# Altium PCB PCB1.PcbDoc (part 8 of 8)
Units mil, origin at the board's own origin, x right, y up, seen from the top; angles counter-clockwise.
Board outline 6000 x 4000 mil, 2 copper layers (Top Layer, Bottom Layer); 1253 components, 565 nets, 6549 pads, 0 vias.
Unrouted connection lines stored in the file: 1925.
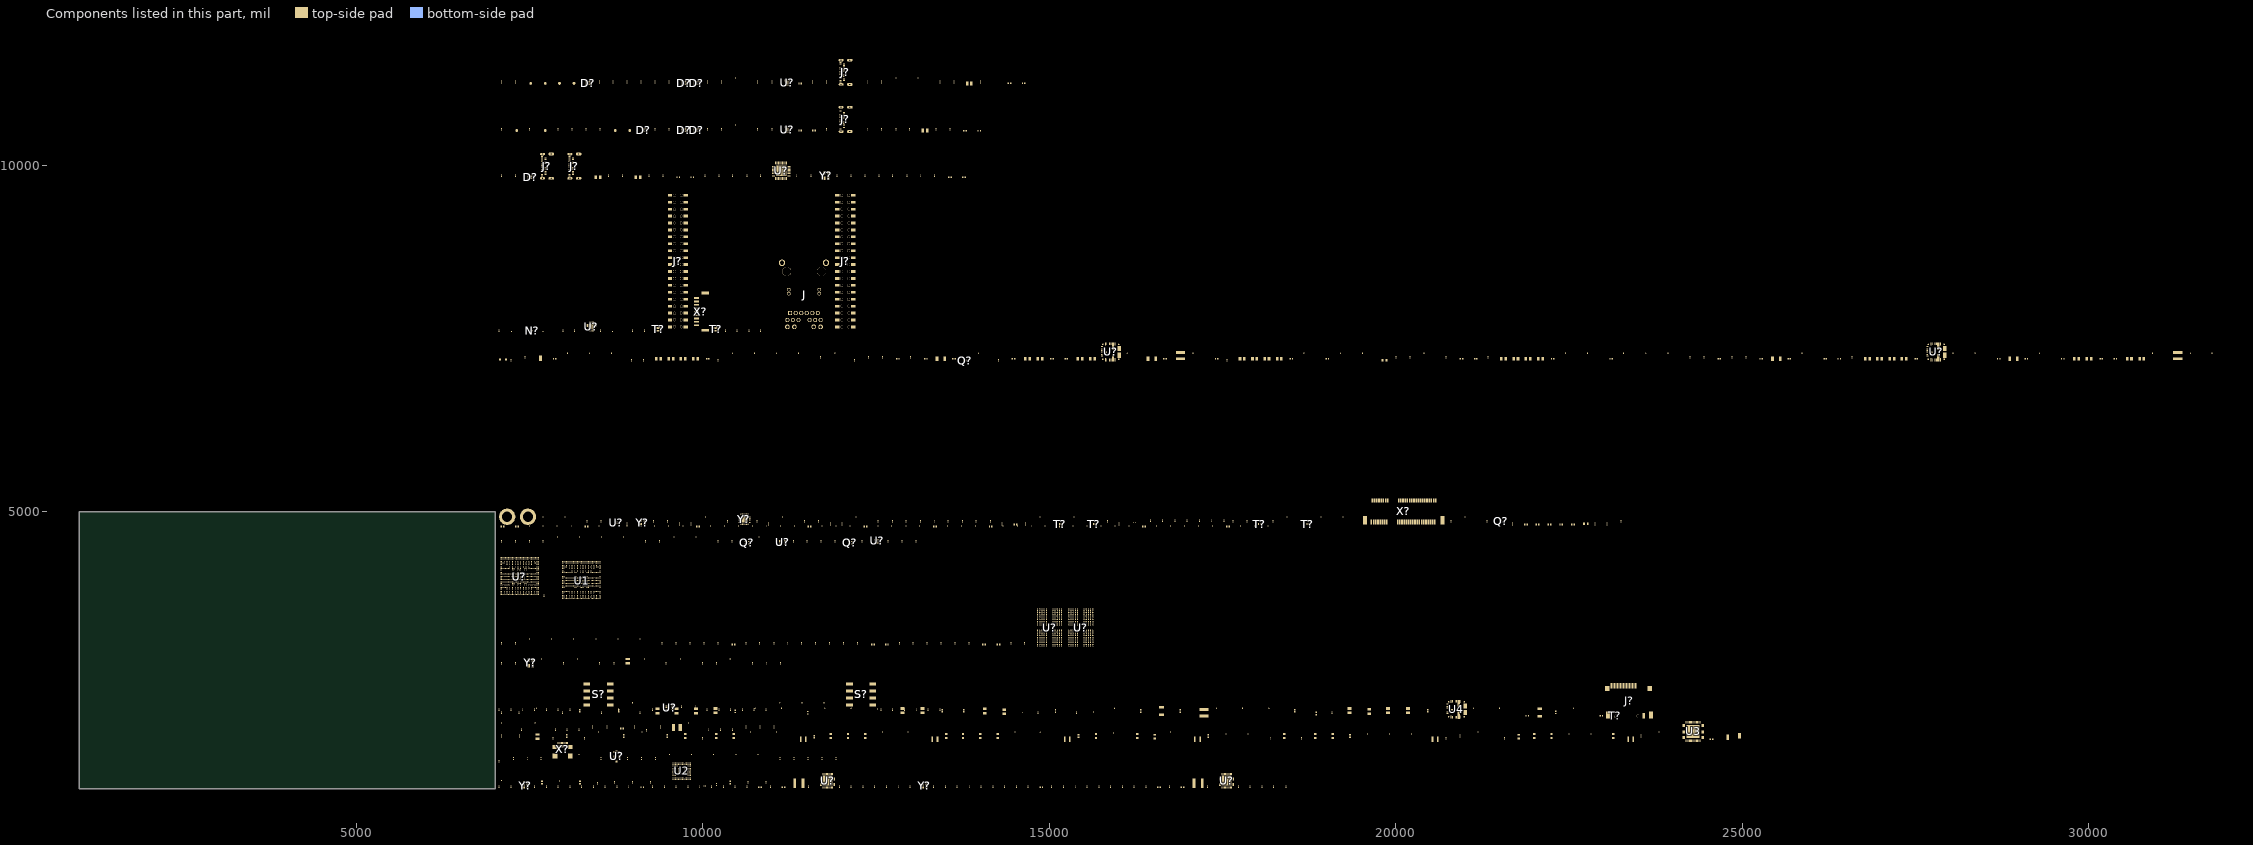
[diagram p6: the components of this part, seen from the top]

## Nets (pads, with @x,y where several pads share a name; then routed paths per layer and width w, separated by ;. In a path a pad name is that pad's centre, name@x,y a point inside that pad or via, vN(x,y) a via of type N, cw(c..) or ccw(c..) an arc to the next point about the centre after c; other vN are vias at no path point) (continued)
pads on no net: 1?.1@16219.17,4840 1?.2@16240.83,4840 ?.1@16460,4854.17 ?.1@16635,4854.17 ?.1@16815,4854.17 ?.1@16990,4854.17 ?.1@17170,4854.17 ?.1@17345,4854.17 ?.1@17525,4854.17 ?.2@16460,4875.83 ?.2@16635,4875.83 ?.2@16815,4875.83 ?.2@16990,4875.83 ?.2@17170,4875.83 ?.2@17345,4875.83 ?.2@17525,4875.83 C?.1@7060,1383.58 C?.1@7060,7598.58 C?.1@7090,2798.58 C?.1@7090,10508.58 C?.1@7230,1013.58 C?.1@7265,1423.58 C?.1@7295,2798.58 C?.1@7295,11188.58 C?.1@7465,1423.58 C?.1@7500,10508.58 C?.1@7570,1013.58 C?.1@7740,1013.58 C?.1@7844.25,7205 C?.1@7910,1013.58 C?.1@7980,7598.58 C?.1@8080,1013.58 C?.1@8250,1013.58 C?.1@8420,1013.58 C?.1@8453.5,9825 C?.1@8505,11188.58 C?.1@8510,2798.58 C?.1@8525,7598.58 C?.1@8530,1423.58 C?.1@8530,4848.58 C?.1@8590,1013.58 C?.1@8640,9833.58 C?.1@8715,2798.58 C?.1@8760,1013.58 C?.1@8817.28,1870 C?.1@8905,4808.58 C?.1@8915,1423.58 C?.1@8930,1013.58 C?.1@8970,7173.58 C?.1@9015,1878.58 C?.1@9033.5,9825 C?.1@9107.28,1020 C?.1@9115,1423.58 C?.1@9140,7173.58 C?.1@9175,4558.58 C?.1@9220,9833.58 C?.1@9275,1013.58 C?.1@9290,4848.58 C?.1@9328.5,7205 C?.1@9385,1878.58 C?.1@9445,1013.58 C?.1@9490,4848.58 C?.1@9508.5,7205 C?.1@9574.8,1885 C?.1@9615,1013.58 C?.1@9615,3088.58 C?.1@9660,4808.58 C?.1@9683.5,7205 C?.1@9690,2168.58 C?.1@9785,1013.58 C?.1@9815,3088.58 C?.1@9830,4808.58 C?.1@9863.5,7205 C?.1@9890,2168.58 C?.1@9955,1013.58 C?.1@10015,3088.58 C?.1@10054.25,7205 C?.1@10070,10508.58 C?.1@10070,11188.58 C?.1@10220,3088.58 C?.1@10270,10508.58 C?.1@10270,11188.58 C?.1@10295,1013.58 C?.1@10325,7598.58 C?.1@10422.28,3080 C?.1@10465,1013.58 C?.1@10495,7598.58 C?.1@10620,3088.58 C?.1@10625,1878.58 C?.1@10665,7598.58 C?.1@10780,4848.58 C?.1@10790,10508.58 C?.1@10790,11188.58 C?.1@10807.28,1020 C?.1@10820,3088.58 C?.1@10835,7598.58 C?.1@10950,4808.58 C?.1@10975,1013.58 C?.1@10995,10508.58 C?.1@10995,11188.58 C?.1@11025,3088.58 C?.1@11147.28,1020 C?.1@11305,4558.58 C?.1@11355,9833.58 C?.1@11387.28,10500 C?.1@11387.28,11180 C?.1@11560,9833.58 C?.1@11585,11188.58 C?.1@11587.28,10500 C?.1@11625,3088.58 C?.1@11670,4848.58 C?.1@11840,4808.58 C?.1@11905,4558.58 C?.1@11970,1013.58 C?.1@12010,4808.58 C?.1@12030,3088.58 C?.1@12135,9833.58 C?.1@12140,1013.58 C?.1@12230,3088.58 C?.1@12340,9833.58 C?.1@12437.28,3080 C?.1@12540,9833.58 C?.1@12637.28,3080 C?.1@12670,4558.58 C?.1@12740,9833.58 C?.1@12785,10508.58 C?.1@12799.25,7205 C?.1@12835,3088.58 C?.1@12875,4558.58 C?.1@12945,9833.58 C?.1@12985,10508.58 C?.1@12990,1013.58 C?.1@12995,7213.58 C?.1@13035,3088.58 C?.1@13145,9833.58 C?.1@13173.5,10500 C?.1@13204.25,7205 C?.1@13235,3088.58 C?.1@13330,1013.58 C?.1@13345,9833.58 C?.1@13365,10508.58 C?.1@13379.88,7205 C?.1@13425,11188.58 C?.1@13440,3088.58 C?.1@13500,1013.58 C?.1@13547.28,9825 C?.1@13609.25,7205 C?.1@13625,11188.58 C?.1@13670,1013.58 C?.1@13752.28,9825 C?.1@13813.5,11180 C?.1@13845,1013.58 C?.1@14005,11188.58 C?.1@14015,1013.58 C?.1@14042.28,3080 C?.1@14185,1013.58 C?.1@14247.28,3080 C?.1@14320,4808.58 C?.1@14355,1013.58 C?.1@14445,3088.58 C?.1@14492.28,4815 C?.1@14525,1013.58 C?.1@14645,3088.58 C?.1@14653.5,7205 C?.1@14660,4808.58 C?.1@14695,1013.58 C?.1@14833.5,7205 C?.1@14867.28,1020 C?.1@15024.25,7205 C?.1@15035,1013.58 C?.1@15205,1013.58 C?.1@15229.25,7205 C?.1@15375,1013.58 C?.1@15413.5,7205 C?.1@15545,1013.58 C?.1@15593.5,7205 C?.1@15715,1013.58 C?.1@16010,4808.58 C?.1@16055,1013.58 C?.1@16225,1013.58 C?.1@16424.88,7205 C?.1@16567.28,1020 C?.1@16654.25,7205 C?.1@16735,1013.58 C?.1@16907.28,1020 C?.1@17399.25,7205 C?.1@17730,1013.58 C?.1@17753.5,7205 C?.1@17900,1013.58 C?.1@17933.5,7205 C?.1@18108.5,7205 C?.1@18230,4848.58 C?.1@18288.5,7205 C?.1@18479.25,7205 C?.1@20934.25,7205 C?.1@21139.25,7205 C?.1@21523.5,7205 C?.1@21685,4808.58 C?.1@21703.5,7205 C?.1@21862.28,4815 C?.1@21878.5,7205 C?.1@22032.28,4815 C?.1@22058.5,7205 C?.1@22202.28,4815 C?.1@22249.25,7205 C?.1@22372.28,4815 C?.1@22542.28,4815 C?.1@22717.44,4825 C?.1@22880,4808.58 C?.1@23050,4808.58 C?.1@24654.25,7205 C?.1@25055,7213.58 C?.1@25259.25,7205 C?.1@25439.88,7205 C?.1@25664.25,7205 C?.1@26184.25,7205 C?.1@26778.5,7205 C?.1@26953.5,7205 C?.1@27133.5,7205 C?.1@27308.5,7205 C?.1@27499.25,7205 C?.1@28864.88,7205 C?.1@29089.25,7205 C?.1@29798.5,7205 C?.1@29978.5,7205 C?.1@30169.25,7205 C?.1@30374.25,7205 C?.1@30558.5,7205 C?.1@30738.5,7205 C?.2@7060,1406.42 C?.2@7060,7621.42 C?.2@7090,2821.42 C?.2@7090,10531.42 C?.2@7230,1036.42 C?.2@7265,1446.42 C?.2@7295,2821.42 C?.2@7295,11211.42 C?.2@7465,1446.42 C?.2@7500,10531.42 C?.2@7570,1036.42 C?.2@7740,1036.42 C?.2@7875.75,7205 C?.2@7910,1036.42 C?.2@7980,7621.42 C?.2@8080,1036.42 C?.2@8250,1036.42 C?.2@8420,1036.42 C?.2@8505,11211.42 C?.2@8510,2821.42 C?.2@8516.5,9825 C?.2@8525,7621.42 C?.2@8530,1446.42 C?.2@8530,4871.42 C?.2@8590,1036.42 C?.2@8640,9856.42 C?.2@8715,2821.42 C?.2@8760,1036.42 C?.2@8852.72,1870 C?.2@8905,4831.42 C?.2@8915,1446.42 C?.2@8930,1036.42 C?.2@8970,7196.42 C?.2@9015,1901.42 C?.2@9096.5,9825 C?.2@9115,1446.42 C?.2@9140,7196.42 C?.2@9142.72,1020 C?.2@9175,4581.42 C?.2@9220,9856.42 C?.2@9275,1036.42 C?.2@9290,4871.42 C?.2@9385,1901.42 C?.2@9391.5,7205 C?.2@9445,1036.42 C?.2@9490,4871.42 C?.2@9571.5,7205 C?.2@9615,1036.42 C?.2@9615,3111.42 C?.2@9660,4831.42 C?.2@9675.2,1885 C?.2@9690,2191.42 C?.2@9746.5,7205 C?.2@9785,1036.42 C?.2@9815,3111.42 C?.2@9830,4831.42 C?.2@9890,2191.42 C?.2@9926.5,7205 C?.2@9955,1036.42 C?.2@10015,3111.42 C?.2@10070,10531.42 C?.2@10070,11211.42 C?.2@10085.75,7205 C?.2@10220,3111.42 C?.2@10270,10531.42 C?.2@10270,11211.42 C?.2@10295,1036.42 C?.2@10325,7621.42 C?.2@10457.72,3080 C?.2@10465,1036.42 C?.2@10495,7621.42 C?.2@10620,3111.42 C?.2@10625,1901.42 C?.2@10665,7621.42 C?.2@10780,4871.42 C?.2@10790,10531.42 C?.2@10790,11211.42 C?.2@10820,3111.42 C?.2@10835,7621.42 C?.2@10842.72,1020 C?.2@10950,4831.42 C?.2@10975,1036.42 C?.2@10995,10531.42 C?.2@10995,11211.42 C?.2@11025,3111.42 C?.2@11182.72,1020 C?.2@11305,4581.42 C?.2@11355,9856.42 C?.2@11422.72,10500 C?.2@11422.72,11180 C?.2@11560,9856.42 C?.2@11585,11211.42 C?.2@11622.72,10500 C?.2@11625,3111.42 C?.2@11670,4871.42 C?.2@11830,3111.42 C?.2@11840,4831.42 C?.2@11905,4581.42 C?.2@11970,1036.42 C?.2@12010,4831.42 C?.2@12030,3111.42 C?.2@12135,9856.42 C?.2@12140,1036.42 C?.2@12230,3111.42 C?.2@12340,9856.42 C?.2@12472.72,3080 C?.2@12540,9856.42 C?.2@12670,4581.42 C?.2@12672.72,3080 C?.2@12740,9856.42 C?.2@12785,10531.42 C?.2@12830.75,7205 C?.2@12835,3111.42 C?.2@12875,4581.42 C?.2@12945,9856.42 C?.2@12985,10531.42 C?.2@12990,1036.42 C?.2@12995,7236.42 C?.2@13035,3111.42 C?.2@13145,9856.42 C?.2@13235,3111.42 C?.2@13235.75,7205 C?.2@13236.5,10500 C?.2@13330,1036.42 C?.2@13345,9856.42 C?.2@13365,10531.42 C?.2@13425,11211.42 C?.2@13440,3111.42 C?.2@13490.12,7205 C?.2@13500,1036.42 C?.2@13582.72,9825 C?.2@13625,11211.42 C?.2@13640.75,7205 C?.2@13670,1036.42 C?.2@13787.72,9825 C?.2@13845,1036.42 C?.2@13876.5,11180 C?.2@14005,11211.42 C?.2@14015,1036.42 C?.2@14077.72,3080 C?.2@14185,1036.42 C?.2@14282.72,3080 C?.2@14320,4831.42 C?.2@14355,1036.42 C?.2@14445,3111.42 C?.2@14525,1036.42 C?.2@14527.72,4815 C?.2@14645,3111.42 C?.2@14660,4831.42 C?.2@14695,1036.42 C?.2@14716.5,7205 C?.2@14896.5,7205 C?.2@14902.72,1020 C?.2@15035,1036.42 C?.2@15055.75,7205 C?.2@15205,1036.42 C?.2@15260.75,7205 C?.2@15375,1036.42 C?.2@15476.5,7205 C?.2@15545,1036.42 C?.2@15656.5,7205 C?.2@15715,1036.42 C?.2@16010,4831.42 C?.2@16055,1036.42 C?.2@16225,1036.42 C?.2@16535.12,7205 C?.2@16602.72,1020 C?.2@16685.75,7205 C?.2@16735,1036.42 C?.2@16942.72,1020 C?.2@17430.75,7205 C?.2@17730,1036.42 C?.2@17816.5,7205 C?.2@17900,1036.42 C?.2@17996.5,7205 C?.2@18171.5,7205 C?.2@18230,4871.42 C?.2@18351.5,7205 C?.2@18510.75,7205 C?.2@20965.75,7205 C?.2@21170.75,7205 C?.2@21586.5,7205 C?.2@21685,4831.42 C?.2@21766.5,7205 C?.2@21897.72,4815 C?.2@21941.5,7205 C?.2@22067.72,4815 C?.2@22121.5,7205 C?.2@22237.72,4815 C?.2@22280.75,7205 C?.2@22407.72,4815 C?.2@22577.72,4815 C?.2@22772.56,4825 C?.2@22880,4831.42 C?.2@23050,4831.42 C?.2@24685.75,7205 C?.2@25055,7236.42 C?.2@25290.75,7205 C?.2@25550.12,7205 C?.2@25695.75,7205 C?.2@26215.75,7205 C?.2@26841.5,7205 C?.2@27016.5,7205 C?.2@27196.5,7205 C?.2@27371.5,7205 C?.2@27530.75,7205 C?.2@28975.12,7205 C?.2@29120.75,7205 C?.2@29861.5,7205 C?.2@30041.5,7205 C?.2@30200.75,7205 C?.2@30405.75,7205 C?.2@30621.5,7205 C?.2@30801.5,7205 D?.1@7475.63,9808.58 D?.1@8305.63,11168.58 D?.1@9110.63,10488.58 D?.1@9690.63,10488.58 D?.1@9690.63,11168.58 D?.1@9870.63,10488.58 D?.1@9870.63,11168.58 D?.2@7495.31,9808.58 D?.2@8325.32,11168.58 D?.2@9130.32,10488.58 D?.2@9710.32,10488.58 D?.2@9710.32,11168.58 D?.2@9890.32,10488.58 D?.2@9890.32,11168.58 D?.3@7515,9808.58 D?.3@8345,11168.58 D?.3@9150,10488.58 D?.3@9730,10488.58 D?.3@9730,11168.58 D?.3@9910,10488.58 D?.3@9910,11168.58 D?.4@7534.69,9808.58 D?.4@8364.68,11168.58 D?.4@9169.68,10488.58 D?.4@9749.68,10488.58 D?.4@9749.68,11168.58 D?.4@9929.68,10488.58 D?.4@9929.68,11168.58 D?.5@7554.37,9808.58 D?.5@8384.37,11168.58 D?.5@9189.37,10488.58 D?.5@9769.37,10488.58 D?.5@9769.37,11168.58 D?.5@9949.37,10488.58 D?.5@9949.37,11168.58 D?.6 D?.7 D?.8@7515,9841.44 D?.8@8345,11201.44 D?.8@9150,10521.44 D?.8@9730,10521.44 D?.8@9730,11201.44 D?.8@9910,10521.44 D?.8@9910,11201.44 D?.9 D?.10 J. J.1 J.2@11340,7865 J.3@11420,7865 J.4@11500,7865 J.5@11580,7865 J.6@11660,7865 J.7 J.8@11300,7765 J.9@11380,7765 J.10@11540,7765 J.11@11620,7765 J.12 J.13 J.14 J.15 J.16 J.17 J.18 J.19 J.20 J.S1@11142.5,8590 J.S2@11777.5,8590 J?. J?.1@7315,10500 J?.1@7515,11180 J?.1@7655,7210 J?.1@7725,10500 J?.1@7725,11180 J?.1@7930,11180 J?.1@8140,11180 J?.1@8735,10500 J?.1@8945,10500 J?.1@9754.37,7665 J?.1@12169.37,7665 J?.2@9525.63,7665 J?.2@11940.63,7665 J?.3@9754.37,7765 J?.3@12169.37,7765 J?.4@9525.63,7765 J?.4@11940.63,7765 J?.5@9754.37,7865 J?.5@12169.37,7865 J?.6@9525.63,7865 J?.6@11940.63,7865 J?.6@23247.05,2485.04 J?.7@9754.37,7965 J?.7@12169.37,7965 J?.8@9525.63,7965 J?.8@11940.63,7965 J?.9@9754.37,8065 J?.9@12169.37,8065 J?.10@9525.63,8065 J?.10@11940.63,8065 J?.11@9754.37,8165 J?.11@12169.37,8165 J?.12@9525.63,8165 J?.12@11940.63,8165 J?.13@9754.37,8265 J?.13@12169.37,8265 J?.14@9525.63,8265 J?.14@11940.63,8265 J?.15@9754.37,8365 J?.15@12169.37,8365 J?.16@9525.63,8365 J?.16@11940.63,8365 J?.17@9754.37,8465 J?.17@12169.37,8465 J?.18@9525.63,8465 J?.18@11940.63,8465 J?.19@9754.37,8565 J?.19@12169.37,8565 J?.20@9525.63,8565 J?.20@11940.63,8565 J?.21@9754.37,8665 J?.21@12169.37,8665 J?.22@9525.63,8665 J?.22@11940.63,8665 J?.23@9754.37,8765 J?.23@12169.37,8765 J?.24@9525.63,8765 J?.24@11940.63,8765 J?.25@9754.37,8865 J?.25@12169.37,8865 J?.26@9525.63,8865 J?.26@11940.63,8865 J?.27@9754.37,8965 J?.27@12169.37,8965 J?.28@9525.63,8965 J?.28@11940.63,8965 J?.29@9754.37,9065 J?.29@12169.37,9065 J?.30@9525.63,9065 J?.30@11940.63,9065 J?.31@9754.37,9165 J?.31@12169.37,9165 J?.32@9525.63,9165 J?.32@11940.63,9165 J?.33@9754.37,9265 J?.33@12169.37,9265 J?.34@9525.63,9265 J?.34@11940.63,9265 J?.35@9754.37,9365 J?.35@12169.37,9365 J?.36@9525.63,9365 J?.36@11940.63,9365 J?.37@9754.37,9465 J?.37@12169.37,9465 J?.38@9525.63,9465 J?.38@11940.63,9465 J?.39@9754.37,9565 J?.39@12169.37,9565 J?.40@9525.63,9565 J?.40@11940.63,9565 J?.A1@7678.56,9864.92 J?.A1@8073.56,9864.92 J?.A1@11988.56,10539.92 J?.A1@11988.56,11219.92 J?.A2@7678.56,9896.42 J?.A2@8073.56,9896.42 J?.A2@11988.56,10571.42 J?.A2@11988.56,11251.42 J?.A3@7678.56,9916.1 J?.A3@8073.56,9916.1 J?.A3@11988.56,10591.1 J?.A3@11988.56,11271.1 J?.A4@7678.56,9935.79 J?.A4@8073.56,9935.79 J?.A4@11988.56,10610.79 J?.A4@11988.56,11290.79 J?.A5@7678.56,9955.47 J?.A5@8073.56,9955.47 J?.A5@11988.56,10630.47 J?.A5@11988.56,11310.47 J?.A6@7678.56,9975.16 J?.A6@8073.56,9975.16 J?.A6@11988.56,10650.16 J?.A6@11988.56,11330.16 J?.A7@7678.56,9994.84 J?.A7@8073.56,9994.84 J?.A7@11988.56,10669.84 J?.A7@11988.56,11349.84 J?.A8 J?.A9@7678.56,10034.21 J?.A9@8073.56,10034.21 J?.A9@11988.56,10709.21 J?.A9@11988.56,11389.21 J?.A10@7678.56,10053.9 J?.A10@8073.56,10053.9 J?.A10@11988.56,10728.9 J?.A10@11988.56,11408.9 J?.A11@7678.56,10073.58 J?.A11@8073.56,10073.58 J?.A11@11988.56,10748.58 J?.A11@11988.56,11428.58 J?.A12@7678.56,10105.08 J?.A12@8073.56,10105.08 J?.A12@11988.56,10780.08 J?.A12@11988.56,11460.08 J?.B1@7727.78,10103.11 J?.B1@8122.78,10103.11 J?.B1@12037.78,10778.11 J?.B1@12037.78,11458.11 J?.B2@7727.78,10083.43 J?.B2@8122.78,10083.43 J?.B2@12037.78,10758.43 J?.B2@12037.78,11438.43 J?.B3@7727.78,10063.74 J?.B3@8122.78,10063.74 J?.B3@12037.78,10738.74 J?.B3@12037.78,11418.74 J?.B4@7727.78,10044.06 J?.B4@8122.78,10044.06 J?.B4@12037.78,10719.06 J?.B4@12037.78,11399.06 J?.B5@7727.78,10024.37 J?.B5@8122.78,10024.37 J?.B5@12037.78,10699.37 J?.B5@12037.78,11379.37 J?.B6@7727.78,10004.69 J?.B6@8122.78,10004.69 J?.B6@12037.78,10679.69 J?.B6@12037.78,11359.69 J?.B7@7727.78,9965.32 J?.B7@8122.78,9965.32 J?.B7@12037.78,10640.32 J?.B7@12037.78,11320.32 J?.B8 J?.B9@7727.78,9925.94 J?.B9@8122.78,9925.94 J?.B9@12037.78,10600.94 J?.B9@12037.78,11280.94 J?.B10@7727.78,9906.26 J?.B10@8122.78,9906.26 J?.B10@12037.78,10581.26 J?.B10@12037.78,11261.26 J?.B11@7727.78,9886.57 J?.B11@8122.78,9886.57 J?.B11@12037.78,10561.57 J?.B11@12037.78,11241.57 J?.B12@7727.78,9866.89 J?.B12@8122.78,9866.89 J?.B12@12037.78,10541.89 J?.B12@12037.78,11221.89 J?.SH1@7678.56,9845.24 J?.SH1@8073.56,9845.24 J?.SH1@11988.56,10520.24 J?.SH1@11988.56,11200.24 J?.SH2@7678.56,10124.76 J?.SH2@8073.56,10124.76 J?.SH2@11988.56,10799.76 J?.SH2@11988.56,11479.76 J?.SH3@7811.44,9809.8 J?.SH3@8206.44,9809.8 J?.SH3@12121.44,10484.8 J?.SH3@12121.44,11164.8 J?.SH4@7811.44,10160.2 J?.SH4@8206.44,10160.2 J?.SH4@12121.44,10835.2 J?.SH4@12121.44,11515.2 J?.SH5@7685.45,9809.8 J?.SH5@8080.45,9809.8 J?.SH5@11995.45,10484.8 J?.SH5@11995.45,11164.8 J?.SH6@7685.45,10160.2 J?.SH6@8080.45,10160.2 J?.SH6@11995.45,10835.2 J?.SH6@11995.45,11515.2 L?.1@7090,9833.58 L?.1@7295,9833.58 L?.1@8150,7598.58 L?.1@8985,7598.58 L?.1@9315,1423.58 L?.1@9375,4558.58 L?.1@9510,10508.58 L?.1@9510,11188.58 L?.1@10125,1013.58 L?.1@10355,4848.58 L?.1@11325.94,1075 L?.1@11470,4848.58 L?.1@11525,1013.58 L?.1@11785,10508.58 L?.1@11785,11188.58 L?.1@11935,9833.58 L?.1@12310,1013.58 L?.1@12530,4848.58 L?.1@13075,4558.58 L?.1@14467.28,7205 L?.1@15885,1013.58 L?.1@16895,7203.35 L?.1@17090.94,1075 L?.1@17285,1013.58 L?.1@18070,1013.58 L?.1@18997.28,7205 L?.1@19812.44,7185 L?.1@23092.28,7205 L?.1@26387.28,7205 L?.1@28687.28,7205 L?.1@29612.28,7205 L?.1@31290,7203.35 L?.2@7090,9856.42 L?.2@7295,9856.42 L?.2@8150,7621.42 L?.2@8985,7621.42 L?.2@9315,1446.42 L?.2@9375,4581.42 L?.2@9510,10531.42 L?.2@9510,11211.42 L?.2@10125,1036.42 L?.2@10355,4871.42 L?.2@11444.06,1075 L?.2@11470,4871.42 L?.2@11525,1036.42 L?.2@11785,10531.42 L?.2@11785,11211.42 L?.2@11935,9856.42 L?.2@12310,1036.42 L?.2@12530,4871.42 L?.2@13075,4581.42 L?.2@14502.72,7205 L?.2@15885,1036.42 L?.2@16895,7296.65 L?.2@17209.06,1075 L?.2@17285,1036.42 L?.2@18070,1036.42 L?.2@19032.72,7205 L?.2@19867.56,7185 L?.2@23127.72,7205 L?.2@26422.72,7205 L?.2@28722.72,7205 L?.2@29647.72,7205 L?.2@31290,7296.65 M?.1@7175,4925 M?.1@7475,4925 N?.1@7524.65,7619.45 N?.2@7524.65,7600.55 N?.3@7540,7610 N?.4@7555.35,7600.55 N?.5 PTP?.1@7090,1950 PTP?.1@7235,7600 PTP?.1@7495,3160 PTP?.1@7580,1950 PTP?.1@7670,2870 PTP?.1@7690,4920 PTP?.1@7695,7600 PTP?.1@7815,3160 PTP?.1@7900,4630 PTP?.1@8010,4920 PTP?.1@8045,7285 PTP?.1@8135,3160 PTP?.1@8190,2870 PTP?.1@8210,1495 PTP?.1@8220,4630 PTP?.1@8360,7285 PTP?.1@8455,3160 PTP?.1@8535,4630 PTP?.1@8680,7285 PTP?.1@8695,7600 PTP?.1@8775,3160 PTP?.1@8855,4630 PTP?.1@8985,2240 PTP?.1@9095,3160 PTP?.1@9155,2870 PTP?.1@9520,1495 PTP?.1@9580,4630 PTP?.1@9675,2870 PTP?.1@9795,1950 PTP?.1@9835,1495 PTP?.1@9900,4630 PTP?.1@10035,4920 PTP?.1@10155,1495 PTP?.1@10395,2870 PTP?.1@10425,7285 PTP?.1@10470,10580 PTP?.1@10470,11260 PTP?.1@10475,1495 PTP?.1@10745,7285 PTP?.1@10795,1495 PTP?.1@10810,4630 PTP?.1@11060,7285 PTP?.1@11110,2240 PTP?.1@11150,4920 PTP?.1@11380,7285 PTP?.1@11430,2240 PTP?.1@11750,2240 PTP?.1@11905,7285 PTP?.1@12210,4920 PTP?.1@12785,11260 PTP?.1@13105,11260 PTP?.1@13975,7285 PTP?.1@14865,4920 PTP?.1@15355,4920 PTP?.1@16125,7285 PTP?.1@17075,7285 PTP?.1@18430,4920 PTP?.1@18675,7285 PTP?.1@18920,4920 PTP?.1@19200,7285 PTP?.1@19240,4920 PTP?.1@19520,7285 PTP?.1@20410,7285 PTP?.1@21000,4920 PTP?.1@22450,7285 PTP?.1@22770,7285 PTP?.1@23290,7285 PTP?.1@23610,7285 PTP?.1@23930,7285 PTP?.1@25865,7285 PTP?.1@28045,7285 PTP?.1@28365,7285 PTP?.1@29290,7285 PTP?.1@30925,7285 PTP?.1@31470,7285 PTP?.1@31785,7285 Q?.1@10615.39,4569.69 Q?.1@12105.39,4569.69 Q?.1@13771.22,7188.86 Q?.1@21516.14,4846.22 Q?.2@10615.39,4550 Q?.2@12105.39,4550 Q?.2@13771.22,7171.14 Q?.2@21533.86,4846.22 Q?.3@10615.39,4530.31 Q?.3@12105.39,4530.31 Q?.3@13798.78,7180 Q?.3@21525,4873.78 Q?.4@10664.61,4530.31 Q?.4@12154.61,4530.31 Q?.5 Q?.6 QZ?.1@8915,2810.47 QZ?.2@8915,2869.53 R15.1 R?.1@7060,1013.58 R?.1@7060,2128.58 R?.1@7090,3088.58 R?.1@7090,4558.58 R?.1@7090,11188.58 R?.1@7230,2128.58 R?.1@7230,7173.58 R?.1@7295,3088.58 R?.1@7295,4558.58 R?.1@7380,1838.58 R?.1@7400,2128.58 R?.1@7435,7213.58 R?.1@7495,4558.58 R?.1@7570,2128.58 R?.1@7665,1423.58 R?.1@7695,4558.58 R?.1@7710,3773.58 R?.1@7740,2128.58 R?.1@7870,1838.58 R?.1@7910,2128.58 R?.1@7910,10508.58 R?.1@7990,2798.58 R?.1@8040,1838.58 R?.1@8080,2128.58 R?.1@8110,10508.58 R?.1@8210,1838.58 R?.1@8315,10508.58 R?.1@8330,4848.58 R?.1@8410,1878.58 R?.1@8515,10508.58 R?.1@8615,1878.58 R?.1@8705,11188.58 R?.1@8785,2128.58 R?.1@8905,11188.58 R?.1@9110,11188.58 R?.1@9155,7598.58 R?.1@9275,2128.58 R?.1@9310,10508.58 R?.1@9310,11188.58 R?.1@9410,3088.58 R?.1@9470,2798.58 R?.1@9627.28,9825 R?.1@9827.28,9825 R?.1@9995,2798.58 R?.1@10030,9833.58 R?.1@10060,2128.58 R?.1@10085,1838.58 R?.1@10195,2798.58 R?.1@10220,4558.58 R?.1@10220,7173.58 R?.1@10230,2128.58 R?.1@10230,9833.58 R?.1@10255,1838.58 R?.1@10400,2128.58 R?.1@10420,4558.58 R?.1@10425,1838.58 R?.1@10430,9833.58 R?.1@10570,2128.58 R?.1@10635,1013.58 R?.1@10635,9833.58 R?.1@10715,2798.58 R?.1@10740,2128.58 R?.1@10825,1878.58 R?.1@10835,9833.58 R?.1@10910,2128.58 R?.1@10915,2798.58 R?.1@11030,1878.58 R?.1@11115,1423.58 R?.1@11120,2798.58 R?.1@11225,3088.58 R?.1@11315,1423.58 R?.1@11425,3088.58 R?.1@11505,4558.58 R?.1@11520,1423.58 R?.1@11700,7213.58 R?.1@11705,4558.58 R?.1@11720,1423.58 R?.1@11920,1423.58 R?.1@12190,7173.58 R?.1@12300,4558.58 R?.1@12380,10508.58 R?.1@12380,11188.58 R?.1@12390,7213.58 R?.1@12480,1013.58 R?.1@12570,2128.58 R?.1@12580,10508.58 R?.1@12580,11188.58 R?.1@12595,7213.58 R?.1@12650,1013.58 R?.1@12740,2128.58 R?.1@12820,1013.58 R?.1@12910,2128.58 R?.1@13080,2128.58 R?.1@13250,2128.58 R?.1@13640,3088.58 R?.1@13767.28,10500 R?.1@13840,3088.58 R?.1@13972.28,10500 R?.1@14265,7173.58 R?.1@14407.28,11180 R?.1@14612.28,11180 R?.1@15840,4848.58 R?.1@16395,1013.58 R?.1@17565,7173.58 R?.1@17655,4848.58 R?.1@18240,1013.58 R?.1@18415,1013.58 R?.1@20005,7213.58 R?.1@20210,7213.58 R?.1@20730,7213.58 R?.1@20800,4848.58 R?.1@21335,7213.58 R?.1@23250,4848.58 R?.1@24250,7213.58 R?.1@24450,7213.58 R?.1@24855,7213.58 R?.1@26585,7213.58 R?.2@7060,1036.42 R?.2@7060,2151.42 R?.2@7090,3111.42 R?.2@7090,4581.42 R?.2@7090,11211.42 R?.2@7230,2151.42 R?.2@7230,7196.42 R?.2@7295,3111.42 R?.2@7295,4581.42 R?.2@7380,1861.42 R?.2@7400,2151.42 R?.2@7435,7236.42 R?.2@7495,4581.42 R?.2@7570,2151.42 R?.2@7665,1446.42 R?.2@7695,4581.42 R?.2@7710,3796.42 R?.2@7740,2151.42 R?.2@7870,1861.42 R?.2@7910,2151.42 R?.2@7910,10531.42 R?.2@7990,2821.42 R?.2@8040,1861.42 R?.2@8080,2151.42 R?.2@8110,10531.42 R?.2@8210,1861.42 R?.2@8315,10531.42 R?.2@8330,4871.42 R?.2@8410,1901.42 R?.2@8515,10531.42 R?.2@8615,1901.42 R?.2@8705,11211.42 R?.2@8785,2151.42 R?.2@8905,11211.42 R?.2@9110,11211.42 R?.2@9155,7621.42 R?.2@9275,2151.42 R?.2@9310,10531.42 R?.2@9310,11211.42 R?.2@9410,3111.42 R?.2@9470,2821.42 R?.2@9662.72,9825 R?.2@9862.72,9825 R?.2@9995,2821.42 R?.2@10030,9856.42 R?.2@10060,2151.42 R?.2@10085,1861.42 R?.2@10195,2821.42 R?.2@10220,4581.42 R?.2@10220,7196.42 R?.2@10230,2151.42 R?.2@10230,9856.42 R?.2@10255,1861.42 R?.2@10400,2151.42 R?.2@10420,4581.42 R?.2@10425,1861.42 R?.2@10430,9856.42 R?.2@10570,2151.42 R?.2@10635,1036.42 R?.2@10635,9856.42 R?.2@10715,2821.42 R?.2@10740,2151.42 R?.2@10825,1901.42 R?.2@10835,9856.42 R?.2@10910,2151.42 R?.2@10915,2821.42 R?.2@11030,1901.42 R?.2@11115,1446.42 R?.2@11120,2821.42 R?.2@11225,3111.42 R?.2@11315,1446.42 R?.2@11425,3111.42 R?.2@11505,4581.42 R?.2@11520,1446.42 R?.2@11700,7236.42 R?.2@11705,4581.42 R?.2@11720,1446.42 R?.2@11920,1446.42 R?.2@12190,7196.42 R?.2@12300,4581.42 R?.2@12380,10531.42 R?.2@12380,11211.42 R?.2@12390,7236.42 R?.2@12480,1036.42 R?.2@12570,2151.42 R?.2@12580,10531.42 R?.2@12580,11211.42 R?.2@12595,7236.42 R?.2@12650,1036.42 R?.2@12740,2151.42 R?.2@12820,1036.42 R?.2@12910,2151.42 R?.2@13080,2151.42 R?.2@13250,2151.42 R?.2@13420,2151.42 R?.2@13640,3111.42 R?.2@13802.72,10500 R?.2@13840,3111.42 R?.2@14007.72,10500 R?.2@14265,7196.42 R?.2@14442.72,11180 R?.2@14647.72,11180 R?.2@15840,4871.42 R?.2@16395,1036.42 R?.2@17565,7196.42 R?.2@17655,4871.42 R?.2@18240,1036.42 R?.2@18415,1036.42 R?.2@20005,7236.42 R?.2@20210,7236.42 R?.2@20730,7236.42 R?.2@20800,4871.42 R?.2@21335,7236.42 R?.2@23250,4871.42 R?.2@24250,7236.42 R?.2@24450,7236.42 R?.2@24855,7236.42 R?.2@26585,7236.42 S?.1@8325.71,2510 S?.1@12115.71,2510 S?.2@8325.71,2410 S?.2@12115.71,2410 S?.3@8325.71,2310 S?.3@12115.71,2310 S?.4@8325.71,2210 S?.4@12115.71,2210 S?.5 S?.6 S?.7@8664.29,2410 S?.7@12454.29,2410 S?.8@8664.29,2510 S?.8@12454.29,2510 T?.1@7071.69,7195 T?.1@8840,9834.17 T?.1@9185,1834.17 T?.1@9328.5,7609.33 T?.1@9425,9834.17 T?.1@10158.5,7609.33 T?.1@12735,4849.17 T?.1@12935,4849.17 T?.1@13140,4849.17 T?.1@13340,4849.17 T?.1@13540,4849.17 T?.1@13565,10509.17 T?.1@13745,4849.17 T?.1@13945,4849.17 T?.1@14150,4849.17 T?.1@14205,11189.17 T?.1@15148.19,4829.84 T?.1@15638.19,4829.84 T?.1@17855,4849.17 T?.1@18023.19,4829.84 T?.1@18718.19,4829.84 T?.1@21320,4849.17 T?.2@7158.31,7195 T?.2@8840,9855.83 T?.2@9185,1855.83 T?.2@9344.25,7609.33 T?.2@9425,9855.83 T?.2@10174.25,7609.33 T?.2@12735,4870.83 T?.2@12935,4870.83 T?.2@13140,4870.83 T?.2@13340,4870.83 T?.2@13540,4870.83 T?.2@13565,10530.83 T?.2@13745,4870.83 T?.2@13945,4870.83 T?.2@14150,4870.83 T?.2@14205,11210.83 T?.2@15171.81,4829.84 T?.2@15661.81,4829.84 T?.2@17855,4870.83 T?.2@18046.81,4829.84 T?.2@18741.81,4829.84 T?.2@21320,4870.83 T?.3@9360,7609.33 T?.3@10190,7609.33 T?.3@15171.81,4810.16 T?.3@15661.81,4810.16 T?.3@18046.81,4810.16 T?.3@18741.81,4810.16 T?.4@9375.75,7609.33 T?.4@10205.75,7609.33 T?.4@15148.19,4810.16 T?.4@15638.19,4810.16 T?.4@18023.19,4810.16 T?.4@18718.19,4810.16 T?.5@9391.5,7609.33 T?.5@10221.5,7609.33 T?.6@9391.5,7650.67 T?.6@10221.5,7650.67 T?.7@9375.75,7650.67 T?.7@10205.75,7650.67 T?.8@9360,7650.67 T?.8@10190,7650.67 T?.9@9344.25,7650.67 T?.9@10174.25,7650.67 T?.10@9328.5,7650.67 T?.10@10158.5,7650.67 T?.C1 T?.C2 U1.A10 U1.A13 U1.AA8 U1.AC4 U1.AC5 U1.AC10 U1.AC12 U1.AC14 U1.AC16 U1.AC18 U1.AD10 U1.AD12 U1.AD14 U1.AD16 U1.AD18 U1.AE10 U1.AE12 U1.AE14 U1.AE16 U1.AE18 U1.AF10 U1.AF12 U1.AF14 U1.AF16 U1.AF18 U1.AH8 U1.AH9 U1.AH10 U1.AH11 U1.AH12 U1.AH13 U1.AH14 U1.AH15 U1.AH16 U1.AH17 U1.AH18 U1.AH19 U1.AJ8 U1.AJ9 U1.AJ10 U1.AJ11 U1.AJ12 U1.AJ13 U1.AJ14 U1.AJ15 U1.AJ16 U1.AJ17 U1.AJ18 U1.AJ19 U1.AJ20 U1.B10 U1.B11 U1.B13 U1.E12 U1.F10 U1.F12 U1.F18 U1.F24 U1.G4 U1.J5 U1.J8 U1.J10 U1.L5 U1.L8 U1.N1 U1.N2 U1.N8 U1.P1 U1.P2 U1.R1 U1.R4 U1.R5 U1.R8 U1.T2 U1.U1 U1.U2 U1.U8 U1.W6 U1.W8 U2.A1 U2.A2 U2.A7 U2.A8 U2.A9 U2.A10 U2.A11 U2.A12 U2.A13 U2.A14 U2.B1 U2.B7 U2.B8 U2.B9 U2.B10 U2.B11 U2.B12 U2.B13 U2.B14 U2.C1 U2.C3 U2.C5 U2.C7 U2.C8 U2.C9 U2.C10 U2.C11 U2.C12 U2.C13 U2.C14 U2.D1 U2.D2 U2.D3 U2.D4 U2.D12 U2.D13 U2.D14 U2.E1 U2.E2 U2.E3 U2.E5 U2.E8 U2.E9 U2.E10 U2.E12 U2.E13 U2.E14 U2.F1 U2.F2 U2.F3 U2.F10 U2.F12 U2.F13 U2.F14 U2.G1 U2.G2 U2.G3 U2.G10 U2.G12 U2.G13 U2.G14 U2.H1 U2.H2 U2.H3 U2.H12 U2.H13 U2.H14 U2.J1 U2.J2 U2.J3 U2.J12 U2.J13 U2.J14 U2.K1 U2.K2 U2.K3 U2.K5 U2.K6 U2.K7 U2.K10 U2.K12 U2.K13 U2.K14 U2.L1 U2.L2 U2.L3 U2.L12 U2.L13 U2.L14 U2.M1 U2.M2 U2.M3 U2.M7 U2.M8 U2.M9 U2.M10 U2.M11 U2.M12 U2.M13 U2.M14 U2.N1 U2.N3 U2.N6 U2.N7 U2.N8 U2.N9 U2.N10 U2.N11 U2.N12 U2.N13 U2.N14 U2.P1 U2.P2 U2.P7 U2.P8 U2.P9 U2.P10 U2.P11 U2.P12 U2.P13 U2.P14 U3.6 U4.2 U4.15 U4.16 U4.17 U4.22 U4.23 U4.24 U?.1@8330.94,7701.5 U?.1@8722.52,1535.87 U?.1@8736.22,4830.16 U?.1@9487.2,2195.59 U?.1@11017.8,9998.74 U?.1@11115.55,4584.53 U?.1@11181.54,10533.62 U?.1@11181.54,11213.62 U?.1@11703.54,1185.87 U?.1@15773.43,7411.73 U?.1@17463.54,1185.87 U?.1@27688.43,7411.73 U?.2@8330.94,7685.75 U?.2@8722.52,1520.12 U?.2@8750,4829.17 U?.2@9487.2,2170 U?.2@11017.8,9979.06 U?.2@11112.6,4564.84 U?.2@11181.54,10517.87 U?.2@11181.54,11197.87 U?.2@11703.54,1170.12 U?.2@15760.08,7383.74 U?.2@17463.54,1170.12 U?.2@27675.08,7383.74 U?.3@8330.94,7670 U?.3@8722.52,1504.37 U?.3@8763.78,4829.17 U?.3@9487.2,2144.41 U?.3@11017.8,9959.37 U?.3@11112.6,4545.16 U?.3@11181.54,10502.13 U?.3@11181.54,11182.13 U?.3@11703.54,1154.37 U?.3@15760.08,7364.06 U?.3@17463.54,1154.37 U?.3@27675.08,7364.06 U?.4@8330.94,7654.25 U?.4@8722.52,1488.62 U?.4@8763.78,4850.83 U?.4@9562.8,2144.41 U?.4@11017.8,9939.68 U?.4@11112.6,4525.47 U?.4@11181.54,10486.38 U?.4@11181.54,11166.38 U?.4@11703.54,1138.62 U?.4@15758.11,7344.37 U?.4@17463.54,1138.62 U?.4@27673.11,7344.37 U?.5@8330.94,7638.5 U?.5@8722.52,1472.87 U?.5@8750,4850.83 U?.5@9562.8,2170 U?.5@11017.8,9920 U?.5@11183.5,10468.66 U?.5@11183.5,11148.66 U?.5@11187.4,4525.47 U?.5@11703.54,1122.87 U?.5@15758.11,7324.69 U?.5@17463.54,1122.87 U?.5@27673.11,7324.69 U?.6@8358.5,7610.94 U?.6@8722.52,1457.13 U?.6@8736.22,4850.83 U?.6@9562.8,2195.59 U?.6@11017.8,9900.32 U?.6@11187.4,4545.16 U?.6@11199.25,10468.66 U?.6@11199.25,11148.66 U?.6@11703.54,1107.13 U?.6@15758.11,7305 U?.6@17463.54,1107.13 U?.6@27673.11,7305 U?.7@8374.25,7610.94 U?.7@8722.52,1441.38 U?.7@11017.8,9880.63 U?.7@11187.4,4564.84 U?.7@11215,10468.66 U?.7@11215,11148.66 U?.7@11703.54,1091.38 U?.7@15758.11,7285.31 U?.7@17463.54,1091.38 U?.7@27673.11,7285.31 U?.8@8390,7610.94 U?.8@8722.52,1425.63 U?.8@11017.8,9860.94 U?.8@11187.4,4584.53 U?.8@11230.75,10468.66 U?.8@11230.75,11148.66 U?.8@11703.54,1075.63 U?.8@15758.11,7265.63 U?.8@17463.54,1075.63 U?.8@27673.11,7265.63 U?.9@8405.75,7610.94 U?.9@8722.52,1409.88 U?.9@11017.8,9841.26 U?.9@11246.5,10468.66 U?.9@11246.5,11148.66 U?.9@11703.54,1059.88 U?.9@15760.08,7245.94 U?.9@17463.54,1059.88 U?.9@27675.08,7245.94 U?.10@8421.5,7610.94 U?.10@8722.52,1394.13 U?.10@11051.26,9807.8 U?.10@11248.46,10486.38 U?.10@11248.46,11166.38 U?.10@11703.54,1044.13 U?.10@15760.08,7226.26 U?.10@17463.54,1044.13 U?.10@27675.08,7226.26 U?.11@8449.06,7638.5 U?.11@8747.13,1393.15 U?.11@11070.94,9807.8 U?.11@11248.46,10502.13 U?.11@11248.46,11182.13 U?.11@11729.13,1018.54 U?.11@15773.43,7198.27 U?.11@17489.13,1018.54 U?.11@27688.43,7198.27 U?.12@8449.06,7654.25 U?.12@8762.87,1393.15 U?.12@11090.63,9807.8 U?.12@11248.46,10517.87 U?.12@11248.46,11197.87 U?.12@11744.88,1018.54 U?.12@15811.26,7192.8 U?.12@17504.88,1018.54 U?.12@27726.26,7192.8 U?.13@8449.06,7670 U?.13@8787.48,1394.13 U?.13@11110.32,9807.8 U?.13@11248.46,10533.62 U?.13@11248.46,11213.62 U?.13@11760.63,1018.54 U?.13@15830.94,7188.86 U?.13@17520.63,1018.54 U?.13@27745.94,7188.86 U?.14@8449.06,7685.75 U?.14@8787.48,1409.88 U?.14@11130,9807.8 U?.14@11246.5,10551.34 U?.14@11246.5,11231.34 U?.14@11776.38,1018.54 U?.14@15870.32,7188.86 U?.14@17536.38,1018.54 U?.14@27785.31,7188.86 U?.15@8449.06,7701.5 U?.15@8787.48,1425.63 U?.15@11149.68,9807.8 U?.15@11230.75,10551.34 U?.15@11230.75,11231.34 U?.15@11792.13,1018.54 U?.15@15890,7188.86 U?.15@17552.13,1018.54 U?.15@27805,7188.86 U?.16@8421.5,7729.06 U?.16@8787.48,1441.38 U?.16@11169.37,9807.8 U?.16@11215,10551.34 U?.16@11215,11231.34 U?.16@11807.87,1018.54 U?.16@15919.53,7222.32 U?.16@17567.87,1018.54 U?.16@27834.53,7222.32 U?.17@8405.75,7729.06 U?.17@8787.48,1457.13 U?.17@11189.06,9807.8 U?.17@11199.25,10551.34 U?.17@11199.25,11231.34 U?.17@11823.62,1018.54 U?.17@15949.06,7192.8 U?.17@17583.62,1018.54 U?.17@27864.06,7192.8 U?.18@8390,7729.06 U?.18@8787.48,1472.87 U?.18@11183.5,10551.34 U?.18@11183.5,11231.34 U?.18@11208.74,9807.8 U?.18@11839.37,1018.54 U?.18@16002.64,7198.27 U?.18@17599.37,1018.54 U?.18@27917.64,7198.27 U?.19@8374.25,7729.06 U?.19@8787.48,1488.62 U?.19@11215,10510 U?.19@11215,11190 U?.19@11242.2,9841.26 U?.19@11855.12,1018.54 U?.19@16012.54,7255.79 U?.19@17615.12,1018.54 U?.19@27927.54,7255.79 U?.20@8358.5,7729.06 U?.20@8787.48,1504.37 U?.20@11242.2,9860.94 U?.20@11870.87,1018.54 U?.20@16012.54,7354.21 U?.20@17630.87,1018.54 U?.20@27927.54,7354.21 U?.21@8390,7670 U?.21@8787.48,1520.12 U?.21@11242.2,9880.63 U?.21@11896.46,1044.13 U?.21@16002.64,7411.73 U?.21@17656.46,1044.13 U?.21@27917.64,7411.73 U?.22@8787.48,1535.87 U?.22@11242.2,9900.32 U?.22@11896.46,1059.88 U?.22@15949.06,7417.2 U?.22@17656.46,1059.88 U?.22@27864.06,7417.2 U?.23@8762.87,1536.85 U?.23@11242.2,9920 U?.23@11896.46,1075.63 U?.23@15919.53,7387.68 U?.23@17656.46,1075.63 U?.23@27834.53,7387.68 U?.24@8747.13,1536.85 U?.24@11242.2,9939.68 U?.24@11896.46,1091.38 U?.24@15890,7421.14 U?.24@17656.46,1091.38 U?.24@27805,7421.14 U?.25@11242.2,9959.37 U?.25@11896.46,1107.13 U?.25@15870.32,7421.14 U?.25@17656.46,1107.13 U?.25@27785.31,7421.14 U?.26@11242.2,9979.06 U?.26@11896.46,1122.87 U?.26@15830.94,7421.14 U?.26@17656.46,1122.87 U?.26@27745.94,7421.14 U?.27@11242.2,9998.74 U?.27@11896.46,1138.62 U?.27@15811.26,7417.2 U?.27@17656.46,1138.62 U?.27@27726.26,7417.2 U?.28@11208.74,10032.2 U?.28@11896.46,1154.37 U?.28@15824.06,7299.09 U?.28@17656.46,1154.37 U?.28@27739.06,7299.09 U?.29@11189.06,10032.2 U?.29@11896.46,1170.12 U?.29@17656.46,1170.12 U?.30@11169.37,10032.2 U?.30@11896.46,1185.87 U?.30@17656.46,1185.87 U?.31@11149.68,10032.2 U?.31@11870.87,1211.46 U?.31@17630.87,1211.46 U?.32@11130,10032.2 U?.32@11855.12,1211.46 U?.32@17615.12,1211.46 U?.33@11110.32,10032.2 U?.33@11839.37,1211.46 U?.33@17599.37,1211.46 U?.34@11090.63,10032.2 U?.34@11823.62,1211.46 U?.34@17583.62,1211.46 U?.35 U?.36@11051.26,10032.2 U?.36@11792.13,1211.46 U?.36@17552.13,1211.46 U?.37@11130,9920 U?.37@11776.38,1211.46 U?.37@17536.38,1211.46 U?.38 U?.39 U?.40@11729.13,1211.46 U?.40@17489.13,1211.46 U?.41@11800,1115 U?.41@17560,1115 U?.A1@7074.41,4335.59 U?.A1@12480.63,4614.37 U?.A1@14831.77,3593.7 U?.A1@15281.77,3593.7 U?.A2 U?.A3@7113.78,4335.59 U?.A3@12520,4614.37 U?.A3@14894.76,3593.7 U?.A3@15344.76,3593.7 U?.A4@7133.46,4335.59 U?.A4@12539.68,4614.37 U?.A4@14926.26,3593.7 U?.A4@15376.26,3593.7 U?.A5@7153.15,4335.59 U?.A5@12559.37,4614.37 U?.A5@14957.76,3593.7 U?.A5@15407.76,3593.7 U?.A6 U?.A7 U?.A8@7212.2,4335.59 U?.A8@15052.24,3593.7 U?.A8@15502.24,3593.7 U?.A9@7231.89,4335.59 U?.A9@15083.74,3593.7 U?.A9@15533.74,3593.7 U?.A10@7251.57,4335.59 U?.A10@15115.24,3593.7 U?.A10@15565.24,3593.7 U?.A11 U?.A12 U?.A13 U?.A14 U?.A15 U?.A16 U?.A17 U?.A18 U?.A19 U?.A20 U?.A21 U?.A22 U?.A23 U?.A24 U?.A25 U?.A26 U?.A27 U?.A28 U?.A29 U?.AA1 U?.AA2@7094.09,3941.89 U?.AA2@14863.27,3081.89 U?.AA2@15313.27,3081.89 U?.AA3@7113.78,3941.89 U?.AA3@14894.76,3081.89 U?.AA3@15344.76,3081.89 U?.AA4@7133.46,3941.89 U?.AA4@14926.26,3081.89 U?.AA4@15376.26,3081.89 U?.AA5@7153.15,3941.89 U?.AA5@14957.76,3081.89 U?.AA5@15407.76,3081.89 U?.AA6 U?.AA7 U?.AA8@7212.2,3941.89 U?.AA8@15052.24,3081.89 U?.AA8@15502.24,3081.89 U?.AA9@15083.74,3081.89 U?.AA9@15533.74,3081.89 U?.AA10@7251.57,3941.89 U?.AA10@15115.24,3081.89 U?.AA10@15565.24,3081.89 U?.AA11@7271.26,3941.89 U?.AA11@15146.73,3081.89 U?.AA11@15596.73,3081.89 U?.AA12 U?.AA14 U?.AA16 U?.AA19 U?.AA20 U?.AA22 U?.AA23 U?.AA24 U?.AA25 U?.AA26 U?.AA27 U?.AA28 U?.AA29 U?.AB1 U?.AB2 U?.AB3@14894.76,3056.3 U?.AB3@15344.76,3056.3 U?.AB4@14926.26,3056.3 U?.AB4@15376.26,3056.3 U?.AB5@14957.76,3056.3 U?.AB5@15407.76,3056.3 U?.AB8@7212.2,3922.2 U?.AB8@15052.24,3056.3 U?.AB8@15502.24,3056.3 U?.AB9@15083.74,3056.3 U?.AB9@15533.74,3056.3 U?.AB10@7251.57,3922.2 U?.AB10@15115.24,3056.3 U?.AB10@15565.24,3056.3 U?.AB11 U?.AB12 U?.AB14 U?.AB16 U?.AB18 U?.AB20 U?.AB22 U?.AB28 U?.AB29 U?.AC1 U?.AC2 U?.AC3 U?.AC4 U?.AC5 U?.AC6 U?.AC8 U?.AC10@7251.57,3902.52 U?.AC12@7290.94,3902.52 U?.AC14@7330.31,3902.52 U?.AC16@7369.69,3902.52 U?.AC18@7409.06,3902.52 U?.AC20 U?.AC22 U?.AC24 U?.AC25 U?.AC26 U?.AC27 U?.AC28 U?.AC29 U?.AD1 U?.AD2 U?.AD6 U?.AD8 U?.AD10@7251.57,3882.83 U?.AD12@7290.94,3882.83 U?.AD14@7330.31,3882.83 U?.AD16@7369.69,3882.83 U?.AD18@7409.06,3882.83 U?.AD20 U?.AD22 U?.AD24 U?.AD28 U?.AD29 U?.AE1 U?.AE2 U?.AE3 U?.AE4 U?.AE6 U?.AE8 U?.AE10@7251.57,3863.15 U?.AE12@7290.94,3863.15 U?.AE14@7330.31,3863.15 U?.AE16@7369.69,3863.15 U?.AE18@7409.06,3863.15 U?.AE20 U?.AE22 U?.AE24 U?.AE26 U?.AE27 U?.AE28 U?.AE29 U?.AF1 U?.AF2 U?.AF4 U?.AF6 U?.AF8 U?.AF10@7251.57,3843.46 U?.AF12@7290.94,3843.46 U?.AF14@7330.31,3843.46 U?.AF16@7369.69,3843.46 U?.AF18@7409.06,3843.46 U?.AF20 U?.AF22 U?.AF24 U?.AF26 U?.AF28 U?.AF29 U?.AG1 U?.AG2 U?.AG4 U?.AG6 U?.AG8 U?.AG10 U?.AG12 U?.AG14 U?.AG16 U?.AG18 U?.AG20 U?.AG22 U?.AG24 U?.AG26 U?.AG28 U?.AG29 U?.AH1 U?.AH2 U?.AH3 U?.AH4 U?.AH5 U?.AH6 U?.AH7 U?.AH8@7212.2,3804.09 U?.AH9@7231.89,3804.09 U?.AH10@7251.57,3804.09 U?.AH11@7271.26,3804.09 U?.AH12@7290.94,3804.09 U?.AH13@7310.63,3804.09 U?.AH14@7330.31,3804.09 U?.AH15@7350,3804.09 U?.AH16@7369.69,3804.09 U?.AH17@7389.37,3804.09 U?.AH18@7409.06,3804.09 U?.AH19@7428.74,3804.09 U?.AH20 U?.AH21 U?.AH22 U?.AH23 U?.AH24 U?.AH25 U?.AH26 U?.AH27 U?.AH28 U?.AH29 U?.AJ1 U?.AJ2 U?.AJ3 U?.AJ4 U?.AJ5 U?.AJ6 U?.AJ7 U?.AJ8@7212.2,3784.41 U?.AJ9@7231.89,3784.41 U?.AJ10@7251.57,3784.41 U?.AJ11@7271.26,3784.41 U?.AJ12@7290.94,3784.41 U?.AJ13@7310.63,3784.41 U?.AJ14@7330.31,3784.41 U?.AJ15@7350,3784.41 U?.AJ16@7369.69,3784.41 U?.AJ17@7389.37,3784.41 U?.AJ18@7409.06,3784.41 U?.AJ19@7428.74,3784.41 U?.AJ20@7448.43,3784.41 U?.AJ21 U?.AJ22 U?.AJ23 U?.AJ24 U?.AJ25 U?.AJ26 U?.AJ27 U?.AJ28 U?.AJ29 U?.B1@7074.41,4315.91 U?.B1@12480.63,4594.69 U?.B1@14831.77,3568.11 U?.B1@15281.77,3568.11 U?.B2@7094.09,4315.91 U?.B2@14863.27,3568.11 U?.B2@15313.27,3568.11 U?.B3@7113.78,4315.91 U?.B3@12520,4594.69 U?.B3@14894.76,3568.11 U?.B3@15344.76,3568.11 U?.B4@7133.46,4315.91 U?.B4@12539.68,4594.69 U?.B4@14926.26,3568.11 U?.B4@15376.26,3568.11 U?.B5@7153.15,4315.91 U?.B5@12559.37,4594.69 U?.B5@14957.76,3568.11 U?.B5@15407.76,3568.11 U?.B6 U?.B7 U?.B8@7212.2,4315.91 U?.B8@15052.24,3568.11 U?.B8@15502.24,3568.11 U?.B9@7231.89,4315.91 U?.B9@15083.74,3568.11 U?.B9@15533.74,3568.11 U?.B10@7251.57,4315.91 U?.B10@15115.24,3568.11 U?.B10@15565.24,3568.11 U?.B11@7271.26,4315.91 U?.B11@15146.73,3568.11 U?.B11@15596.73,3568.11 U?.B12 U?.B13 U?.B14 U?.B15 U?.B16 U?.B17 U?.B18 U?.B19 U?.B20 U?.B21 U?.B22 U?.B23 U?.B24 U?.B25 U?.B26 U?.B27 U?.B28 U?.B29 U?.C1@7074.41,4296.22 U?.C1@12480.63,4575 U?.C1@14831.77,3542.52 U?.C1@15281.77,3542.52 U?.C2@7094.09,4296.22 U?.C2@12500.32,4575 U?.C2@14863.27,3542.52 U?.C2@15313.27,3542.52 U?.C3@12520,4575 U?.C3@14894.76,3542.52 U?.C3@15344.76,3542.52 U?.C4@7133.46,4296.22 U?.C4@12539.68,4575 U?.C4@14926.26,3542.52 U?.C4@15376.26,3542.52 U?.C5@12559.37,4575 U?.C5@14957.76,3542.52 U?.C5@15407.76,3542.52 U?.C6 U?.C8@7212.2,4296.22 U?.C8@15052.24,3542.52 U?.C8@15502.24,3542.52 U?.C9@15083.74,3542.52 U?.C9@15533.74,3542.52 U?.C10@7251.57,4296.22 U?.C10@15115.24,3542.52 U?.C10@15565.24,3542.52 U?.C11@15146.73,3542.52 U?.C11@15596.73,3542.52 U?.C12@7290.94,4296.22 U?.C12@15178.23,3542.52 U?.C12@15628.23,3542.52 U?.C14 U?.C16 U?.C18 U?.C20 U?.C22 U?.C24 U?.C26 U?.C28 U?.C29 U?.D1@7074.41,4276.54 U?.D1@12480.63,4555.31 U?.D1@14831.77,3516.93 U?.D1@15281.77,3516.93 U?.D2@7094.09,4276.54 U?.D2@12500.32,4555.31 U?.D2@14863.27,3516.93 U?.D2@15313.27,3516.93 U?.D3@12520,4555.31 U?.D3@14894.76,3516.93 U?.D3@15344.76,3516.93 U?.D4@7133.46,4276.54 U?.D4@12539.68,4555.31 U?.D4@14926.26,3516.93 U?.D4@15376.26,3516.93 U?.D5@12559.37,4555.31 U?.D5@14957.76,3516.93 U?.D5@15407.76,3516.93 U?.D6 U?.D8@7212.2,4276.54 U?.D8@15052.24,3516.93 U?.D8@15502.24,3516.93 U?.D9@15083.74,3516.93 U?.D9@15533.74,3516.93 U?.D10@7251.57,4276.54 U?.D10@15115.24,3516.93 U?.D10@15565.24,3516.93 U?.D11@15146.73,3516.93 U?.D11@15596.73,3516.93 U?.D12@7290.94,4276.54 U?.D12@15178.23,3516.93 U?.D12@15628.23,3516.93 U?.D14 U?.D16 U?.D18 U?.D20 U?.D22 U?.D24 U?.D26 U?.D28 U?.D29 U?.E1@7074.41,4256.85 U?.E1@12480.63,4535.63 U?.E1@14831.77,3491.34 U?.E1@15281.77,3491.34 U?.E2@12500.32,4535.63 U?.E2@14863.27,3491.34 U?.E2@15313.27,3491.34 U?.E3@7113.78,4256.85 U?.E3@12520,4535.63 U?.E3@14894.76,3491.34 U?.E3@15344.76,3491.34 U?.E4@7133.46,4256.85 U?.E4@12539.68,4535.63 U?.E4@14926.26,3491.34 U?.E4@15376.26,3491.34 U?.E5@12559.37,4535.63 U?.E5@14957.76,3491.34 U?.E5@15407.76,3491.34 U?.E6 U?.E8@7212.2,4256.85 U?.E8@15052.24,3491.34 U?.E8@15502.24,3491.34 U?.E9@15083.74,3491.34 U?.E9@15533.74,3491.34 U?.E10@7251.57,4256.85 U?.E10@15115.24,3491.34 U?.E10@15565.24,3491.34 U?.E11@15146.73,3491.34 U?.E11@15596.73,3491.34 U?.E12@7290.94,4256.85 U?.E12@15178.23,3491.34 U?.E12@15628.23,3491.34 U?.E14 U?.E16 U?.E18 U?.E20 U?.E22 U?.E24 U?.E26 U?.E27 U?.E28 U?.E29 U?.F1@7074.41,4237.17 U?.F1@14831.77,3465.75 U?.F1@15281.77,3465.75 U?.F2@7094.09,4237.17 U?.F2@14863.27,3465.75 U?.F2@15313.27,3465.75 U?.F3@14894.76,3465.75 U?.F3@15344.76,3465.75 U?.F4@14926.26,3465.75 U?.F4@15376.26,3465.75 U?.F5@14957.76,3465.75 U?.F5@15407.76,3465.75 U?.F6 U?.F8@7212.2,4237.17 U?.F8@15052.24,3465.75 U?.F8@15502.24,3465.75 U?.F9@15083.74,3465.75 U?.F9@15533.74,3465.75 U?.F10@7251.57,4237.17 U?.F10@15115.24,3465.75 U?.F10@15565.24,3465.75 U?.F11@15146.73,3465.75 U?.F11@15596.73,3465.75 U?.F12@7290.94,4237.17 U?.F12@15178.23,3465.75 U?.F12@15628.23,3465.75 U?.F14 U?.F16 U?.F18 U?.F20 U?.F22 U?.F24 U?.F28 U?.F29 U?.G1@7074.41,4217.48 U?.G1@14831.77,3440.16 U?.G1@15281.77,3440.16 U?.G2@7094.09,4217.48 U?.G2@14863.27,3440.16 U?.G2@15313.27,3440.16 U?.G3@7113.78,4217.48 U?.G3@14894.76,3440.16 U?.G3@15344.76,3440.16 U?.G4@7133.46,4217.48 U?.G4@14926.26,3440.16 U?.G4@15376.26,3440.16 U?.G5@7153.15,4217.48 U?.G5@14957.76,3440.16 U?.G5@15407.76,3440.16 U?.G6 U?.G8@7212.2,4217.48 U?.G8@15052.24,3440.16 U?.G8@15502.24,3440.16 U?.G9@15083.74,3440.16 U?.G9@15533.74,3440.16 U?.G10@7251.57,4217.48 U?.G10@15115.24,3440.16 U?.G10@15565.24,3440.16 U?.G11 U?.G12@7290.94,4217.48 U?.G12@15178.23,3440.16 U?.G12@15628.23,3440.16 U?.G14 U?.G16 U?.G18 U?.G20 U?.G22 U?.G24 U?.G25 U?.G26 U?.G27 U?.G28 U?.G29 U?.H1@7074.41,4197.8 U?.H1@14831.77,3414.57 U?.H1@15281.77,3414.57 U?.H2@7094.09,4197.8 U?.H2@14863.27,3414.57 U?.H2@15313.27,3414.57 U?.H3@14894.76,3414.57 U?.H3@15344.76,3414.57 U?.H4@14926.26,3414.57 U?.H4@15376.26,3414.57 U?.H5@14957.76,3414.57 U?.H5@15407.76,3414.57 U?.H8@7212.2,4197.8 U?.H8@15052.24,3414.57 U?.H8@15502.24,3414.57 U?.H9@15083.74,3414.57 U?.H9@15533.74,3414.57 U?.H10@7251.57,4197.8 U?.H10@15115.24,3414.57 U?.H10@15565.24,3414.57 U?.H11@15146.73,3414.57 U?.H11@15596.73,3414.57 U?.H12@7290.94,4197.8 U?.H12@15178.23,3414.57 U?.H12@15628.23,3414.57 U?.H14 U?.H16 U?.H18 U?.H20 U?.H22 U?.H28 U?.H29 U?.J1@7074.41,4178.11 U?.J1@14831.77,3388.98 U?.J1@15281.77,3388.98 U?.J2@7094.09,4178.11 U?.J2@14863.27,3388.98 U?.J2@15313.27,3388.98 U?.J3@7113.78,4178.11 U?.J3@14894.76,3388.98 U?.J3@15344.76,3388.98 U?.J4@7133.46,4178.11 U?.J4@14926.26,3388.98 U?.J4@15376.26,3388.98 U?.J5@7153.15,4178.11 U?.J5@14957.76,3388.98 U?.J5@15407.76,3388.98 U?.J6 U?.J7 U?.J8@7212.2,4178.11 U?.J8@15052.24,3388.98 U?.J8@15502.24,3388.98 U?.J9@15083.74,3388.98 U?.J9@15533.74,3388.98 U?.J10@7251.57,4178.11 U?.J10@15115.24,3388.98 U?.J10@15565.24,3388.98 U?.J11@7271.26,4178.11 U?.J11@15146.73,3388.98 U?.J11@15596.73,3388.98 U?.J12@15178.23,3388.98 U?.J12@15628.23,3388.98 U?.J14 U?.J16 U?.J19 U?.J20 U?.J22 U?.J23 U?.J24 U?.J25 U?.J26 U?.J27 U?.J28 U?.J29 U?.K1@7074.41,4158.43 U?.K1@14831.77,3363.39 U?.K1@15281.77,3363.39 U?.K2@7094.09,4158.43 U?.K2@14863.27,3363.39 U?.K2@15313.27,3363.39 U?.K3@14894.76,3363.39 U?.K3@15344.76,3363.39 U?.K4@14926.26,3363.39 U?.K4@15376.26,3363.39 U?.K5 U?.K8 U?.K9@15083.74,3363.39 U?.K9@15533.74,3363.39 U?.K10@7251.57,4158.43 U?.K10@15115.24,3363.39 U?.K10@15565.24,3363.39 U?.K11@7271.26,4158.43 U?.K11@15146.73,3363.39 U?.K11@15596.73,3363.39 U?.K12@15178.23,3363.39 U?.K12@15628.23,3363.39 U?.K14 U?.K15 U?.K16 U?.K19 U?.K20 U?.K28 U?.K29 U?.L1 U?.L2 U?.L3 U?.L4 U?.L5 U?.L6 U?.L7 U?.L8 U?.L9 U?.L10 U?.L11 U?.L12 U?.L13 U?.L14 U?.L16 U?.L17 U?.L18 U?.L19 U?.L20 U?.L21 U?.L22 U?.L23 U?.L24 U?.L25 U?.L26 U?.L27 U?.L28 U?.L29 U?.M1 U?.M2 U?.M11 U?.M14 U?.M16 U?.M19 U?.M28 U?.M29 U?.N1@7074.41,4099.37 U?.N1@14831.77,3286.61 U?.N1@15281.77,3286.61 U?.N2@7094.09,4099.37 U?.N2@14863.27,3286.61 U?.N2@15313.27,3286.61 U?.N3@7113.78,4099.37 U?.N3@14894.76,3286.61 U?.N3@15344.76,3286.61 U?.N4@7133.46,4099.37 U?.N4@14926.26,3286.61 U?.N4@15376.26,3286.61 U?.N5 U?.N6 U?.N7 U?.N8 U?.N9@7231.89,4099.37 U?.N9@15083.74,3286.61 U?.N9@15533.74,3286.61 U?.N10@7251.57,4099.37 U?.N10@15115.24,3286.61 U?.N10@15565.24,3286.61 U?.N11@7271.26,4099.37 U?.N11@15146.73,3286.61 U?.N11@15596.73,3286.61 U?.N12@7290.94,4099.37 U?.N12@15178.23,3286.61 U?.N12@15628.23,3286.61 U?.N13 U?.N14 U?.N15 U?.N16 U?.N17 U?.N18 U?.N19 U?.N20 U?.N21 U?.N22 U?.N23 U?.N24 U?.N25 U?.N26 U?.N27 U?.N28 U?.N29 U?.P1@7074.41,4079.68 U?.P1@14831.77,3261.02 U?.P1@15281.77,3261.02 U?.P2@7094.09,4079.68 U?.P2@14863.27,3261.02 U?.P2@15313.27,3261.02 U?.P3@14894.76,3261.02 U?.P3@15344.76,3261.02 U?.P4@14926.26,3261.02 U?.P4@15376.26,3261.02 U?.P5@14957.76,3261.02 U?.P5@15407.76,3261.02 U?.P8@15052.24,3261.02 U?.P8@15502.24,3261.02 U?.P9@15083.74,3261.02 U?.P9@15533.74,3261.02 U?.P10@15115.24,3261.02 U?.P10@15565.24,3261.02 U?.P11@7271.26,4079.68 U?.P11@15146.73,3261.02 U?.P11@15596.73,3261.02 U?.P12@15178.23,3261.02 U?.P12@15628.23,3261.02 U?.P14 U?.P16 U?.P19 U?.P28 U?.P29 U?.R1@7074.41,4060 U?.R1@14831.77,3235.43 U?.R1@15281.77,3235.43 U?.R2@7094.09,4060 U?.R2@14863.27,3235.43 U?.R2@15313.27,3235.43 U?.R3@7113.78,4060 U?.R3@14894.76,3235.43 U?.R3@15344.76,3235.43 U?.R4@7133.46,4060 U?.R4@14926.26,3235.43 U?.R4@15376.26,3235.43 U?.R5@7153.15,4060 U?.R5@14957.76,3235.43 U?.R5@15407.76,3235.43 U?.R6 U?.R7 U?.R8@7212.2,4060 U?.R8@15052.24,3235.43 U?.R8@15502.24,3235.43 U?.R9@7231.89,4060 U?.R9@15083.74,3235.43 U?.R9@15533.74,3235.43 U?.R10@7251.57,4060 U?.R10@15115.24,3235.43 U?.R10@15565.24,3235.43 U?.R11@7271.26,4060 U?.R11@15146.73,3235.43 U?.R11@15596.73,3235.43 U?.R12@7290.94,4060 U?.R12@15178.23,3235.43 U?.R12@15628.23,3235.43 U?.R13 U?.R14 U?.R16 U?.R17 U?.R18 U?.R19 U?.R20 U?.R21 U?.R22 U?.R23 U?.R24 U?.R25 U?.R26 U?.R27 U?.R28 U?.R29 U?.T1@7074.41,4040.32 U?.T1@14831.77,3209.84 U?.T1@15281.77,3209.84 U?.T2@7094.09,4040.32 U?.T2@14863.27,3209.84 U?.T2@15313.27,3209.84 U?.T3@14894.76,3209.84 U?.T3@15344.76,3209.84 U?.T4@14926.26,3209.84 U?.T4@15376.26,3209.84 U?.T5@14957.76,3209.84 U?.T5@15407.76,3209.84 U?.T8@15052.24,3209.84 U?.T8@15502.24,3209.84 U?.T9@15083.74,3209.84 U?.T9@15533.74,3209.84 U?.T10@15115.24,3209.84 U?.T10@15565.24,3209.84 U?.T11@7271.26,4040.32 U?.T11@15146.73,3209.84 U?.T11@15596.73,3209.84 U?.T12@15178.23,3209.84 U?.T12@15628.23,3209.84 U?.T14 U?.T16 U?.T19 U?.T28 U?.T29 U?.U1@7074.41,4020.63 U?.U1@14831.77,3184.25 U?.U1@15281.77,3184.25 U?.U2@7094.09,4020.63 U?.U2@14863.27,3184.25 U?.U2@15313.27,3184.25 U?.U3@7113.78,4020.63 U?.U3@14894.76,3184.25 U?.U3@15344.76,3184.25 U?.U4@7133.46,4020.63 U?.U4@14926.26,3184.25 U?.U4@15376.26,3184.25 U?.U5@7153.15,4020.63 U?.U5@14957.76,3184.25 U?.U5@15407.76,3184.25 U?.U6 U?.U7 U?.U8@7212.2,4020.63 U?.U8@15052.24,3184.25 U?.U8@15502.24,3184.25 U?.U9@7231.89,4020.63 U?.U9@15083.74,3184.25 U?.U9@15533.74,3184.25 U?.U10@7251.57,4020.63 U?.U10@15115.24,3184.25 U?.U10@15565.24,3184.25 U?.U11@7271.26,4020.63 U?.U11@15146.73,3184.25 U?.U11@15596.73,3184.25 U?.U12@7290.94,4020.63 U?.U12@15178.23,3184.25 U?.U12@15628.23,3184.25 U?.U13 U?.U14 U?.U15 U?.U16 U?.U17 U?.U18 U?.U19 U?.U20 U?.U21 U?.U22 U?.U23 U?.U24 U?.U25 U?.U26 U?.U27 U?.U28 U?.U29 U?.V1@7074.41,4000.94 U?.V1@14831.77,3158.66 U?.V1@15281.77,3158.66 U?.V2@7094.09,4000.94 U?.V2@14863.27,3158.66 U?.V2@15313.27,3158.66 U?.V3@14894.76,3158.66 U?.V3@15344.76,3158.66 U?.V4@14926.26,3158.66 U?.V4@15376.26,3158.66 U?.V5@14957.76,3158.66 U?.V5@15407.76,3158.66 U?.V8@15052.24,3158.66 U?.V8@15502.24,3158.66 U?.V9@15083.74,3158.66 U?.V9@15533.74,3158.66 U?.V10@15115.24,3158.66 U?.V10@15565.24,3158.66 U?.V11@7271.26,4000.94 U?.V11@15146.73,3158.66 U?.V11@15596.73,3158.66 U?.V12@15178.23,3158.66 U?.V12@15628.23,3158.66 U?.V14 U?.V16 U?.V19 U?.V28 U?.V29 U?.W1@7074.41,3981.26 U?.W1@14831.77,3133.07 U?.W1@15281.77,3133.07 U?.W2@7094.09,3981.26 U?.W2@14863.27,3133.07 U?.W2@15313.27,3133.07 U?.W3@7113.78,3981.26 U?.W3@14894.76,3133.07 U?.W3@15344.76,3133.07 U?.W4@7133.46,3981.26 U?.W4@14926.26,3133.07 U?.W4@15376.26,3133.07 U?.W5@7153.15,3981.26 U?.W5@14957.76,3133.07 U?.W5@15407.76,3133.07 U?.W6 U?.W7 U?.W8@7212.2,3981.26 U?.W8@15052.24,3133.07 U?.W8@15502.24,3133.07 U?.W9@7231.89,3981.26 U?.W9@15083.74,3133.07 U?.W9@15533.74,3133.07 U?.W10@7251.57,3981.26 U?.W10@15115.24,3133.07 U?.W10@15565.24,3133.07 U?.W11@7271.26,3981.26 U?.W11@15146.73,3133.07 U?.W11@15596.73,3133.07 U?.W12@7290.94,3981.26 U?.W12@15178.23,3133.07 U?.W12@15628.23,3133.07 U?.W13 U?.W14 U?.W16 U?.W17 U?.W18 U?.W19 U?.W20 U?.W21 U?.W22 U?.W23 U?.W24 U?.W25 U?.W26 U?.W27 U?.W28 U?.W29 U?.Y1@7074.41,3961.57 U?.Y1@14831.77,3107.48 U?.Y1@15281.77,3107.48 U?.Y2@7094.09,3961.57 U?.Y2@14863.27,3107.48 U?.Y2@15313.27,3107.48 U?.Y3@14894.76,3107.48 U?.Y3@15344.76,3107.48 U?.Y4@14926.26,3107.48 U?.Y4@15376.26,3107.48 U?.Y5@14957.76,3107.48 U?.Y5@15407.76,3107.48 U?.Y8@15052.24,3107.48 U?.Y8@15502.24,3107.48 U?.Y9@15083.74,3107.48 U?.Y9@15533.74,3107.48 U?.Y10@7251.57,3961.57 U?.Y10@15115.24,3107.48 U?.Y10@15565.24,3107.48 U?.Y11@7271.26,3961.57 U?.Y11@15146.73,3107.48 U?.Y11@15596.73,3107.48 U?.Y12@15178.23,3107.48 U?.Y12@15628.23,3107.48 U?.Y14 U?.Y15 U?.Y16 U?.Y19 U?.Y20 U?.Y28 U?.Y29 X?.1@8045.87,1659 X?.1@9907.17,7688.15 X?.1@19650.43,4848.58 X?.2@8037.99,1610.77 X?.2@9907.17,7737.36 X?.2@19666.18,5159.61 X?.3@8030.12,1659 X?.3@9907.17,7786.57 X?.3@19681.93,4848.58 X?.4@8022.24,1610.77 X?.4@9907.17,7835.79 X?.4@19697.68,5159.61 X?.5@8014.37,1659 X?.5@9907.17,7885 X?.5@19713.43,4848.58 X?.6@8006.5,1610.77 X?.6@9907.17,7934.21 X?.6@19729.17,5159.61 X?.7@7998.62,1659 X?.7@9907.17,7983.43 X?.7@19744.92,4848.58 X?.8@7990.75,1610.77 X?.8@9907.17,8032.64 X?.8@19760.67,5159.61 X?.9@7982.87,1659 X?.9@9907.17,8081.85 X?.9@19776.42,4848.58 X?.10@7975,1610.77 X?.10@19792.17,5159.61 X?.11@7967.13,1659 X?.11@19807.91,4848.58 X?.12@7959.25,1610.77 X?.12@19823.66,5159.61 X?.13@7951.38,1659 X?.13@19839.41,4848.58 X?.14@7943.5,1610.77 X?.14@19855.16,5159.61 X?.15@7935.63,1659 X?.15@19870.91,4848.58 X?.16@7927.76,1610.77 X?.16@19886.65,5159.61 X?.17@7919.88,1659 X?.17@20028.39,4848.58 X?.18@7912.01,1610.77 X?.18@20044.13,5159.61 X?.19@7904.13,1659 X?.19@20059.88,4848.58 X?.20@8085.24,1602.89 X?.20@20075.63,5159.61 X?.21@7864.76,1602.89 X?.21@20091.38,4848.58 X?.22@7864.76,1471 X?.22@20107.13,5159.61 X?.23@8085.24,1471 X?.23@20122.87,4848.58 X?.24@20138.62,5159.61 X?.25@20154.37,4848.58 X?.26@20170.12,5159.61 X?.27@20185.87,4848.58 X?.28 X?.29@20217.36,4848.58 X?.30@20233.11,5159.61 X?.31@20248.86,4848.58 X?.32@20264.61,5159.61 X?.33@20280.35,4848.58 X?.34@20296.1,5159.61 X?.35@20311.85,4848.58 X?.36@20327.6,5159.61 X?.37@20343.35,4848.58 X?.38@20359.09,5159.61 X?.39@20374.84,4848.58 X?.40@20390.59,5159.61 X?.41@20406.34,4848.58 X?.42 X?.43@20437.83,4848.58 X?.44 X?.45 X?.46 X?.47 X?.48 X?.49 X?.50@20548.07,5159.61 X?.51 X?.52@20579.57,5159.61 X?.55 X?.56 X?.MP1@10035.12,8154.69 X?.MP1@19554.96,4872.2 X?.MP2@10035.12,7615.31 X?.MP2@20675.04,4872.2 Y?.1@7412.44,1018.35 Y?.1@7485.47,2854.37 Y?.1@9102.44,4818.35 Y?.1@10526.18,4939.22 Y?.1@11750.47,9889.37 Y?.1@13172.44,1018.35 Y?.2@7467.56,1018.35 Y?.2@7485.47,2775.63 Y?.2@9157.56,4818.35 Y?.2@10526.18,4919.53 Y?.2@11750.47,9810.63 Y?.2@13227.56,1018.35 Y?.3@7467.56,1061.65 Y?.3@7544.53,2775.63 Y?.3@9157.56,4861.65 Y?.3@10526.18,4899.85 Y?.3@11809.53,9810.63 Y?.3@13227.56,1061.65 Y?.4@7412.44,1061.65
pads on no net: Y?.4@7544.53,2854.37 Y?.4@9102.44,4861.65 Y?.4@10526.18,4880.16 Y?.4@11809.53,9889.37 Y?.4@13172.44,1061.65 Y?.5@10526.18,4860.48 Y?.6@10526.18,4840.79 Y?.7@10550.79,4816.18 Y?.8@10570.48,4816.18 Y?.9@10590.16,4816.18 Y?.10@10609.85,4816.18 Y?.11 Y?.12@10649.22,4816.18 Y?.13@10673.82,4840.79 Y?.14@10673.82,4860.48 Y?.15@10673.82,4880.16 Y?.16 Y?.17@10673.82,4919.53 Y?.18@10673.82,4939.22 Y?.19@10649.22,4963.82 Y?.20 Y?.21@10609.85,4963.82 Y?.22 Y?.23@10570.48,4963.82 Y?.24@10550.79,4963.82 Y?.25@10600,4890